# Altium PCB Projet M1S1 ceinture.PCBDOC
Units mm, origin at the board's own origin, x right, y up, seen from the top; angles counter-clockwise.
Board outline 299.72 x 199.9 mm, 2 copper layers (Top Layer, Bottom Layer); 6 components, 7 nets, 32 pads, 4 vias.
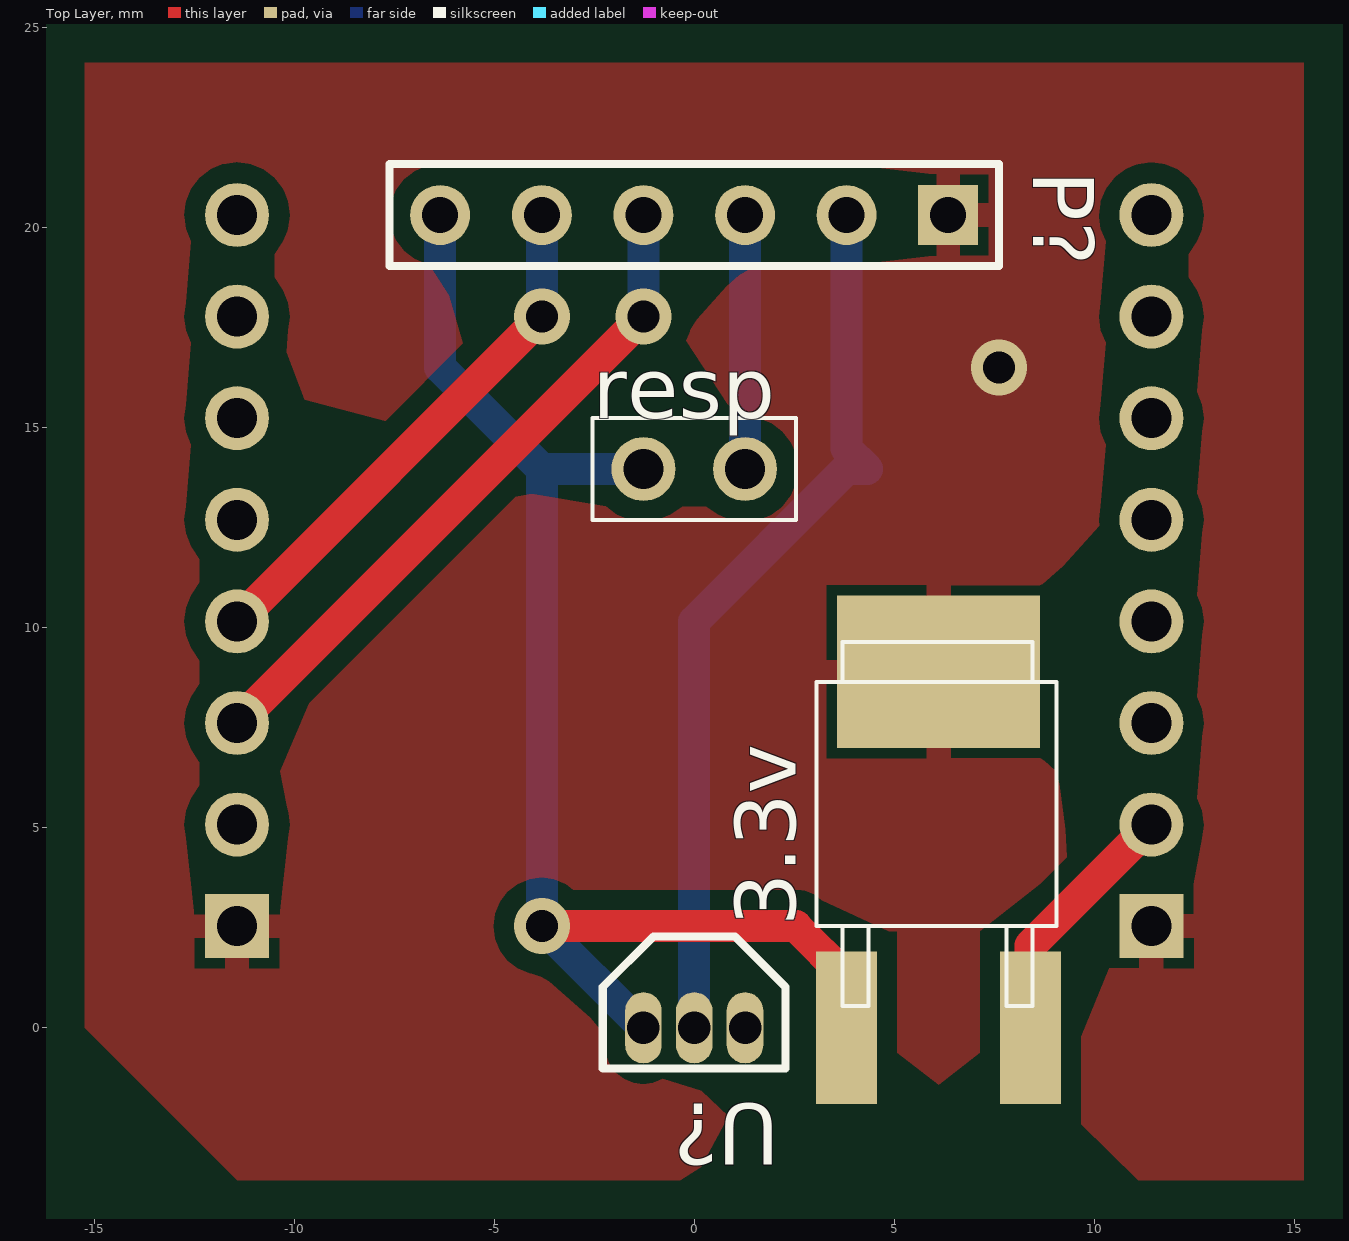
[diagram p0: Top Layer view]
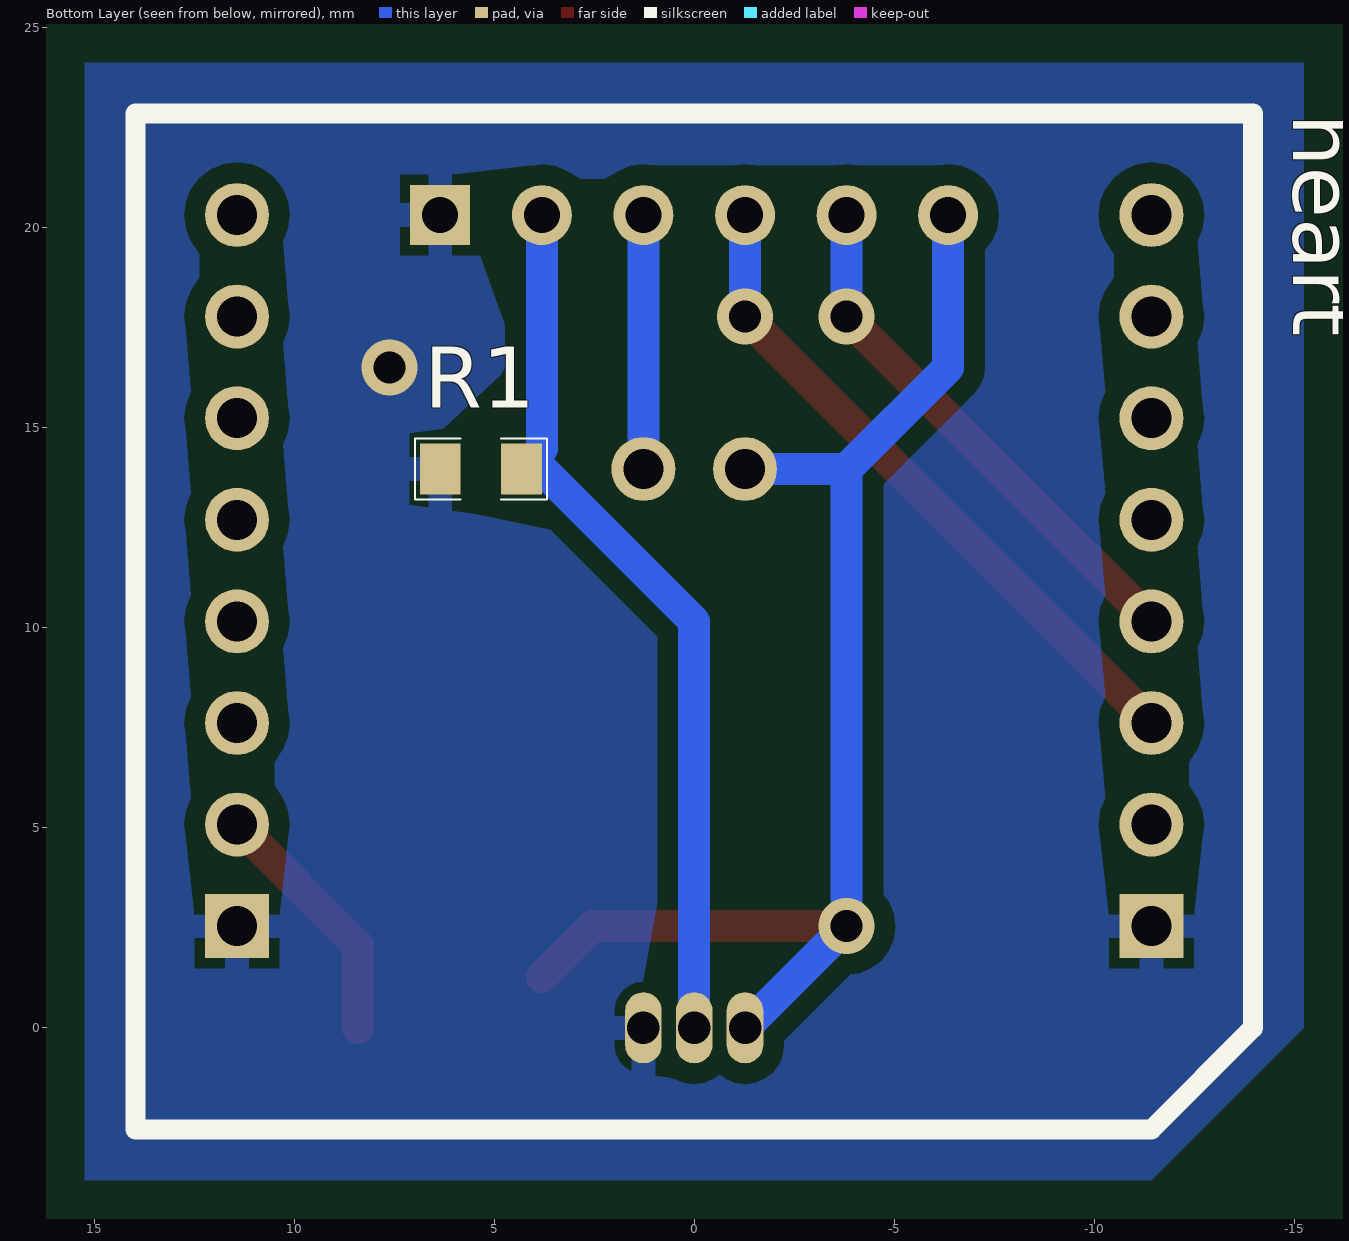
[diagram p1: Bottom Layer view, seen from below]

## Layer stack, top to bottom
Top Solder: solder mask 0.0102, Solder Resist, Dk 3.5
Top Layer: signal copper 0.0356
Dielectric1: dielectric 0.32, FR-4, Dk 4.8
Bottom Layer: signal copper 0.0356
Bottom Solder: solder mask 0.0102, Solder Resist, Dk 3.5

## Board outline
-141.655,-46.39 158.065,-46.39 158.065,153.508 -141.655,153.508

## Design rules (kind name [scope] priority, off if disabled: settings)
Clearance Clearance_bottom_polygon [OnLayer('Bottom Layer') Or OnLayer('Multi-Layer') vs OnLayer('Bottom Layer')  And  InPoly] p1: gap=0.508
Clearance Clearance_top_polygon [OnLayer('Top Layer')  Or OnLayer('Multi-Layer') vs OnLayer('Top Layer') And InPoly] p2: gap=0.508
Clearance Clearance_bottom [OnLayer('Bottom Layer') Or OnLayer('Multi-Layer') vs OnLayer('Bottom Layer')  And Not InPoly] p3: gap=0.203
Clearance Clearance_top [OnLayer('Top Layer')  Or OnLayer('Multi-Layer') vs OnLayer('Top Layer') And Not InPoly] p4: gap=0.203
Clearance Clearance_pad_to_pad [OnLayer('Multi-Layer') vs OnLayer('Multi-Layer')] p5: gap=0.254
ComponentClearance ComponentClearance_bottom [OnLayer('Bottom Overlay') vs OnLayer('Bottom Overlay')] p1: gap=0 collisioncheckmode=3 verticalgap=0.254 showdistances=FALSE
ComponentClearance ComponentClearance_top [OnLayer('Top Overlay') vs OnLayer('Top Overlay')] p2: gap=0 collisioncheckmode=3 verticalgap=0.254 showdistances=FALSE
FabricationTestPointUsage TestPointUsage [All] p1: valid=0 allowmultiple=FALSE
FabricationTestpoint Testpoint [All] p1: side=3 testpointundercomponent=TRUE minsize=1.016 maxsize=2.54 preferedsize=1.524 minholesize=0 maxholesize=1.016 preferedholesize=0.813 testpointgrid=0.025 allowsidetop=TRUE allowsidebottom=TRUE usegrid=TRUE gridtolerance=0
HoleSize [All] p1: absolutevalues=TRUE maxlimit=25.4 minlimit=0.406 maxpercent=80.000 minpercent=20.000
MinimumAnnularRing [PadXSize_AllLayers = PadYSize_AllLayers] p1: minimumring=0.254
PermittedLayers [All] p1: toplayerpermitted=TRUE bottomlayerpermitted=TRUE
PolygonConnect [All] p1: connectstyle=Relief reliefconductorwidth=0.61 reliefentries=4 polygonreliefangle="90 Angle" airgapwidth=0.254
RoutingVias [All] p1: holewidth=0.406 width=0.914 viastyle="Through Hole" minholewidth=0.406 minwidth=0.914 maxholewidth=25.4 maxwidth=25.4
SMDNeckDown [All] p1: percent=90.000
SMDToPlane [All] p1: distance=0
SolderMaskExpansion [All] p1: expansion=0.102
ViasUnderSMD [All] p1: allowed=FALSE
Width [All] p1: maxlimit=1.2 minlimit=0.8 preferedwidth=0.8
Width Width_botom_top [OnLayer('Bottom Layer') or OnLayer('Top Layer')] p2: maxlimit=254 minlimit=0.254 preferedwidth=0.813
26 further rules are at their usual default settings.

## Components (designator, comment, footprint, x,y, rotation, side; value= is the part's Value field where it differs from the comment)
3.3v "78xx" TO252 3.81,0 r0 top
heart "MAX3010x" "MAX30100 maxim" 11.43,2.54 r180 bottom
P? "Header 6" HDR1X6 -6.35,20.32 r0 top
R1 "RES" 0805 6.35,13.97 r180 bottom
resp "Stretch Sensor" "Stretch Sensor" 0,13.97 r270 top (schematic designator "Stretch Sensor")
U? "LM35" Z03A 1.27,0 r180 top

## Footprints (in the part's own frame and the unit in brackets; to place one, negate y for a bottom-side part, rotate by r counter-clockwise, add the part's x,y. Pads: shape width x height; smd on the part's side, far side on the other; paste and mask are expansions set on the pad)
0805 [mil]
  rect 40x50 smd: 1(0,0) 2(80,0)
  silkscreen extent -25,-30 105,30
HDR1X6 [mm] "Connector; Header; 6 Position"
  round 1.5 hole 0.9: 1(0,0) 2(2.54,0) 3(5.08,0) 4(7.62,0) 5(10.16,0)
  rect 1.5x1.5 hole 0.9: 6(12.7,0)
  silkscreen extent -1.27,-1.27 13.97,1.27
"MAX30100 maxim" [mm]
  round 1.6 hole 1: 0(0,5.08) 0(0,7.62) 0(0,10.16) 0(0,12.7) 0(0,15.24) 0(0,17.78) 0(22.86,2.54) 0(22.86,10.16) 0(22.86,12.7) 0(22.86,17.78) 1(22.86,15.24) 3(0,2.54) 4(22.86,5.08) 5(22.86,7.62)
  rect 1.6x1.6 hole 1: 2(0,0) 2(22.86,0)
  silkscreen extent -2.54,-5.08 25.4,20.32
"Stretch Sensor" [mm]
  round 1.6 hole 1: 1(0,1.27) 2(0,-1.27)
  silkscreen extent -1.27,-2.54 1.27,2.54
TO252 [mm]
  rect 1.524x3.81 smd: 1(0,0) 3(4.6,0)
  rect 5.08x3.81 smd: 2(2.3,8.9)
  silkscreen extent -0.75,0.55 5.25,9.65
Z03A [mil]
  oval 36x70 hole 32: 1(100,0) 2(50,0) 3(0,0)
  silkscreen extent -40,-90 140,40

## Part data
3.3v: library part REG_POS, "régulateur positif fixe"
heart: "Heart rate and SpO2 sensor"
P?: "Header, 6-Pin"
R1: "resistance"

## Via types
v1: diameter 1.4, hole 0.8, Top Layer to Bottom Layer, 4 vias

## Nets (pads, with @x,y where several pads share a name; then routed paths per layer and width w, separated by ;. In a path a pad name is that pad's centre, name@x,y a point inside that pad or via, vN(x,y) a via of type N, cw(c..) or ccw(c..) an arc to the next point about the centre after c; other vN are vias at no path point)
A1: P?.5 R1.2 U?.2 | length 22.6
  Bottom Layer w0.8: U?.2 0,10.16 3.81,13.97 R1.2 3.81,14.478 P?.5
A3: P?.4 resp.1 | length 6.3
  Bottom Layer w0.8: resp.1 P?.4
GND: 3.3v.2 heart.2 P?.6 R1.1 U?.3
  other v1: 7.62,16.51
Net3.3v_3: 3.3v.3 heart.3 | length 6.3
  Top Layer w0.8: 3.3v.3 8.41,2.06 heart.3
SCL: heart.5 P?.2 | length 13.3
  Top Layer w0.8: heart.5 v1(-3.81,17.78)
  Bottom Layer w0.8: v1(-3.81,17.78) P?.2
SDA: heart.4 P?.3 | length 16.9
  Top Layer w0.8: heart.4 v1(-1.27,17.78)
  Bottom Layer w0.8: v1(-1.27,17.78) P?.3
VCC: 3.3v.1 P?.1 resp.2 U?.1 | length 33.1
  Top Layer w0.8: v1(-3.81,2.54) 2.54,2.54 3.3v.1@3.81,1.27
  Bottom Layer w0.8: P?.1 -6.35,16.51 -3.81,13.97 ; U?.1 v1(-3.81,2.54) -3.81,13.97 ; resp.2 -3.81,13.97
pads on no net: heart.0 heart.1

## Polygon pours and split planes (outlines as drawn)
GND on Top Layer "Bot GND" (solid, pour order 8): -15.24,24.13 -15.24,0 -11.43,-3.81 15.24,-3.81 15.24,24.13
GND on Bottom Layer "Bot GND" (solid, pour order 10): -15.24,24.13 -15.24,0 -11.43,-3.81 15.24,-3.81 15.24,24.13

## Keep-outs
Keep-Out Layer:
  rectangle: -135.695,152.27 149.305,157.27
  rectangle: 149.305,-37.73 154.305,157.27
  rectangle: -135.695,-42.73 154.305,-37.73
  rectangle: -140.695,-42.73 -135.695,157.27

## Silkscreen, mask and mechanical layers (free items; w line width, h text height)
Top Overlay:
  text "Les bandes en violet delimitent la surface utilisable...." at -144.907,179.832 h6.35
  text "Mais vous n'etes pas obliges de tout utiliser!!" at -128.651,169.545 h6.35
Mechanical 1:
  lines w0.5: -15.24,0 -11.43,-3.81 15.24,-3.81 15.24,24.13 -15.24,24.13 -15.24,0